# Altium PCB JWpulsegen-V1.PcbDoc
Units mil, origin at the board's own origin, x right, y up, seen from the top; angles counter-clockwise.
Board outline 2603.97 x 1676.2 mil, 2 copper layers (Top Layer, Bottom Layer), stack 64.8 mil thick; 24 components, 12 nets, 64 pads, 84 vias.
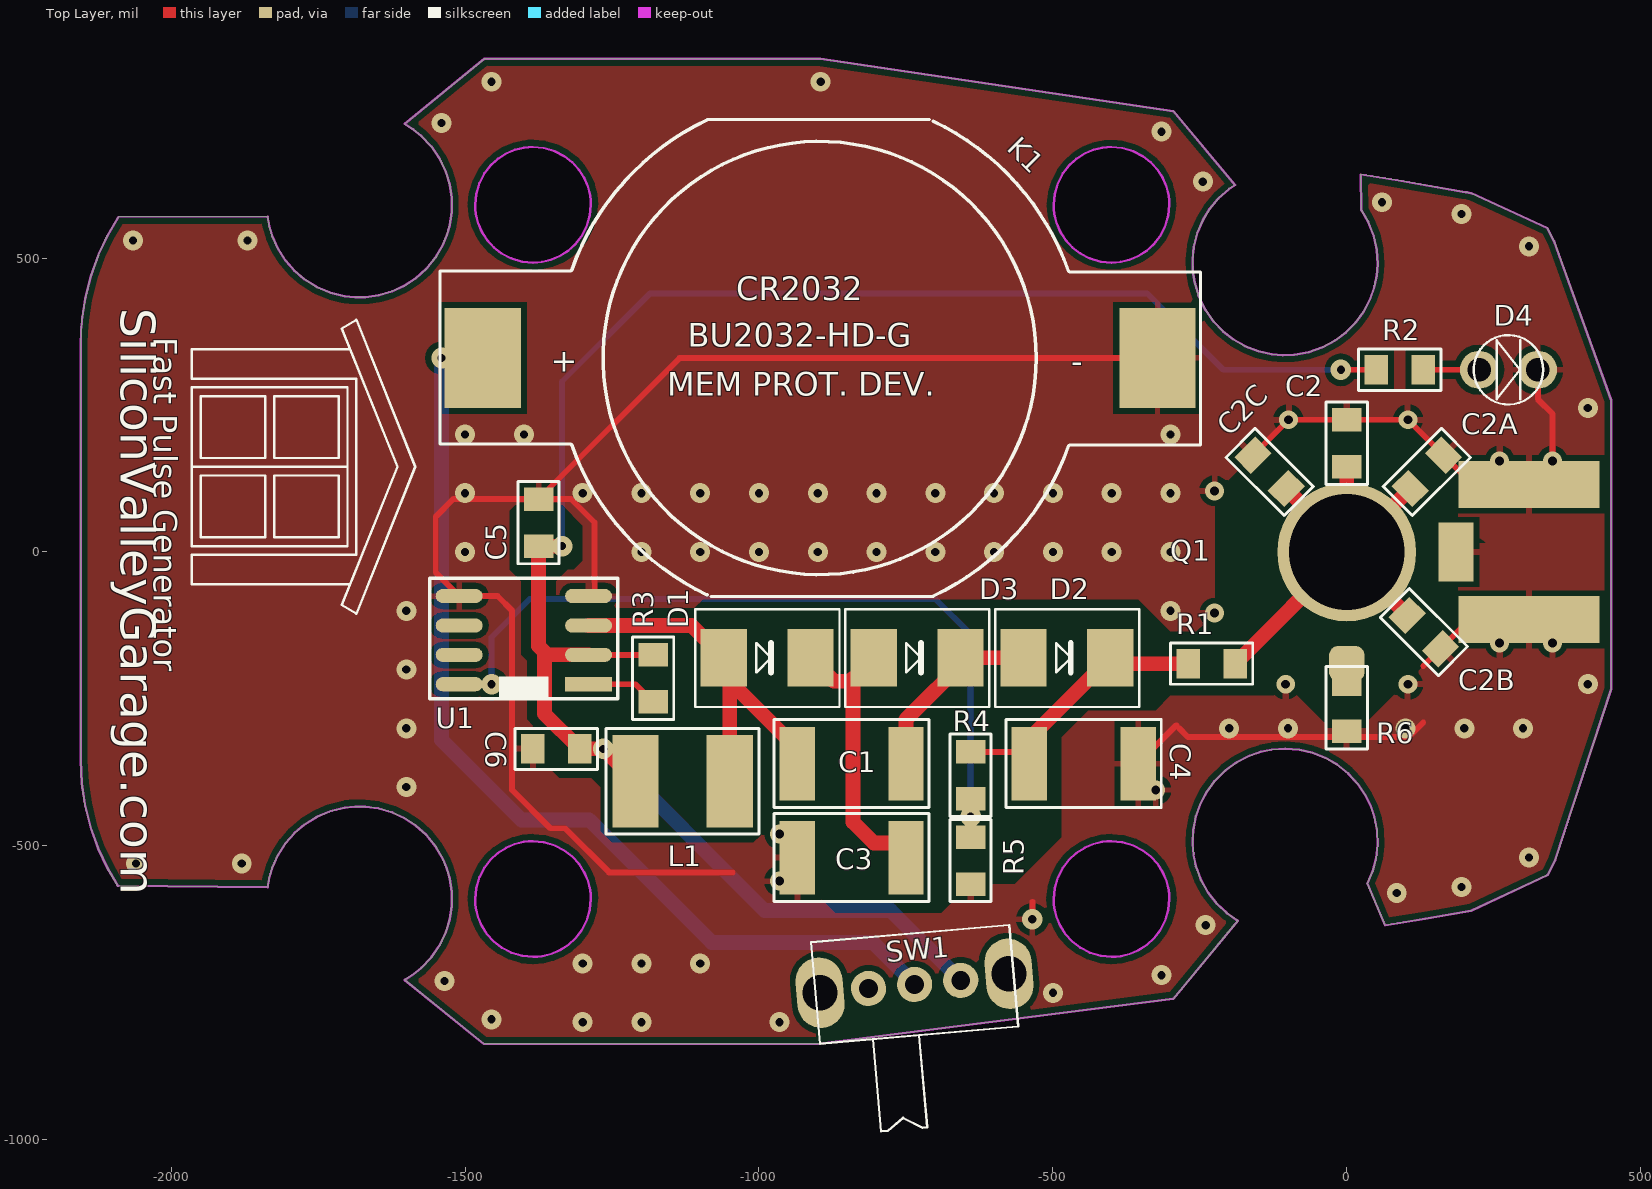
[diagram p0: Top Layer view]
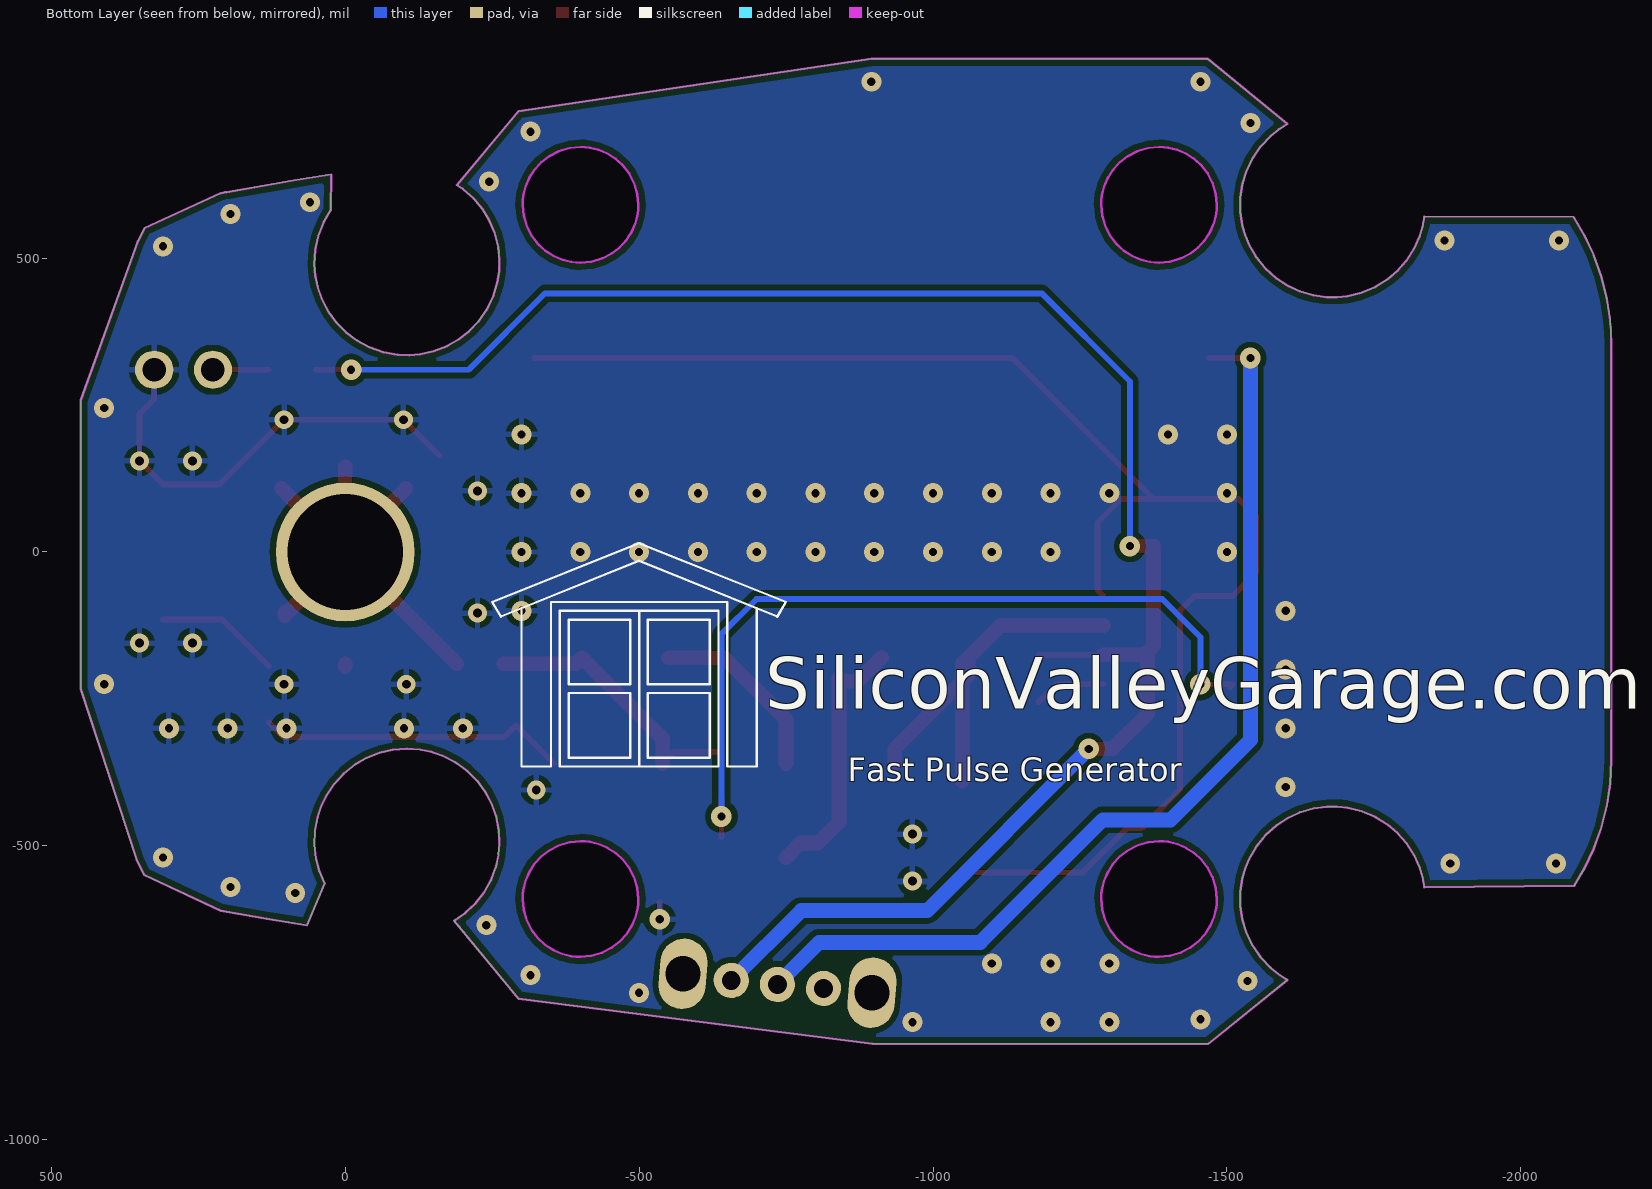
[diagram p1: Bottom Layer view, seen from below]

## Layer stack, top to bottom
Top Solder: solder mask 0.4, Solder Resist, Dk 3.5
Top Layer: signal copper 1.4
Dielectric1: core 62, FR-4, Dk 4.8
Bottom Layer: signal copper 1.4
Bottom Solder: solder mask 0.4, Solder Resist, Dk 3.5

## Board outline
-1603.01,-727.9 -1588.49,-718.71 -1574.66,-707.65 -1557.59,-689.72 -1543.46,-669.19 -1532.68,-646.55 -1526.14,-624.83 -1522.78,-602.26 -1522.81,-578.3 -1526.26,-555.48 -1530.99,-538.96 -1537.71,-522.57 -1550.1,-501.14 -1565.8,-481.79 -1584.49,-465.08 -1603.49,-452.68 -1624.2,-443.09 -1647.19,-436.36 -1670.06,-433.24 -1687.24,-433.12 -1704.86,-434.95 -1728.92,-440.79 -1751.9,-450.41 -1773.21,-463.62 -1790.46,-478.36 -1805.49,-495.52 -1818.44,-515.69 -1827.87,-536.75 -1832.84,-553.2 -1836.05,-570.62 -2090.84,-567.97 -2108.84,-537.22 -2124,-504.91 -2137.3,-467.64 -2146.77,-429.29 -2151.97,-393.84 -2153.97,-354.25 -2153.97,354.51 -2153.44,374.68 -2151.87,394.85 -2146.54,430.33 -2136.93,468.92 -2123.65,505.98 -2108.51,538.09 -2090.43,568.81 -2089.56,570 -1836.05,570.88 -1832.84,553.46 -1827.87,537.01 -1818.44,515.95 -1805.5,495.78 -1790.47,478.62 -1773.21,463.88 -1751.91,450.67 -1728.92,441.05 -1704.86,435.2 -1687.25,433.38 -1670.07,433.5 -1647.2,436.62 -1624.2,443.35 -1603.5,452.93 -1584.49,465.33 -1565.81,482.05 -1550.1,501.39 -1537.71,522.82 -1530.99,539.21 -1526.27,555.73 -1522.81,578.54 -1522.78,602.51 -1526.14,625.07 -1532.68,646.8 -1543.45,669.44 -1557.58,689.97 -1574.65,707.9 -1588.48,718.96 -1603,728.15 -1467,839.2 -895.32,838.96 -295,750 -190,624.25 -200.19,617.72 -218.85,601.08 -233.28,583.63 -245.11,564.18 -254.06,543.12 -260.09,519.67 -262.44,496.63 -261.82,477.72 -258.79,458.3 -251.59,434.68 -240.71,412.33 -226.34,391.86 -210.69,375.5 -192.76,361.48 -172.88,350.15 -150.29,341.42 -127.68,336.41 -108.83,334.82 -89.19,335.57 -64.89,339.97 -41.43,348.18 -19.42,360.07 -1.35,373.71 14.66,389.89 28.23,408.31 39.52,429.74 47.13,451.61 50.9,470.15 52.44,489.74 50.9,514.39 45.48,538.65 36.23,561.89 24.79,581.42 23.86,642.32 92.5,631.18 202.09,612.24 204.78,611.75 207.47,611.27 211.78,610.5 341.17,551.14 352.73,528.59 450,258.11 450,-232.92 354.39,-524.39 342.1,-549.32 211.78,-610.24 209.09,-610.72 206.4,-611.21 202.09,-611.98 133.64,-623.98 65.08,-635.44 35.12,-563.84 43.97,-543.01 49.77,-521 52.34,-498.26 51.44,-474.06 47.12,-451.3 41.14,-433.36 32.7,-415.61 19.06,-395.02 2.25,-376.7 -17.35,-361.17 -37.02,-349.95 -58.2,-341.64 -80.49,-336.44 -104.63,-334.52 -127.73,-336.16 -146.25,-340.01 -164.86,-346.33 -186.9,-357.48 -207.05,-372.04 -224.75,-389.7 -238.18,-407.93 -248.91,-428 -256.66,-449.53 -261.38,-473.29 -262.44,-496.42 -260.77,-515.27 -256.66,-534.49 -248.15,-557.67 -236.03,-579.37 -220.55,-599.01 -204.01,-614.48 -185.32,-627.47 -295,-760 -896.55,-836.55 -1468,-837
cut-out: -400.29,-688.85 -392.64,-688.55 -384.81,-687.62 -369.57,-683.93 -354.56,-677.58 -340.47,-668.58 -327.98,-657.19 -317.65,-643.88 -309.16,-627.61 -303.6,-608.81 -301.87,-590.42 -302.16,-582.77 -303.09,-574.94 -306.78,-559.7 -313.13,-544.69 -322.13,-530.6 -333.52,-518.11 -346.83,-507.78 -363.11,-499.29 -381.9,-493.73 -400.29,-492 -407.94,-492.3 -415.77,-493.22 -431.01,-496.91 -446.02,-503.26 -460.11,-512.26 -472.6,-523.65 -482.93,-536.96 -491.42,-553.24 -496.98,-572.03 -498.72,-590.42 -498.42,-598.07 -497.49,-605.9 -493.8,-621.14 -487.45,-636.15 -478.45,-650.24 -467.06,-662.73 -453.75,-673.06 -437.48,-681.55 -418.68,-687.11
cut-out: -1384.54,-688.85 -1376.89,-688.55 -1369.06,-687.62 -1353.82,-683.93 -1338.82,-677.58 -1324.73,-668.58 -1312.23,-657.19 -1301.9,-643.88 -1293.41,-627.61 -1287.85,-608.81 -1286.12,-590.42 -1286.42,-582.77 -1287.34,-574.94 -1291.04,-559.7 -1297.39,-544.69 -1306.38,-530.6 -1317.77,-518.11 -1331.08,-507.78 -1347.36,-499.29 -1366.15,-493.73 -1384.54,-492 -1392.2,-492.3 -1400.02,-493.22 -1415.26,-496.91 -1430.27,-503.26 -1444.36,-512.26 -1456.86,-523.65 -1467.18,-536.96 -1475.67,-553.24 -1481.24,-572.03 -1482.97,-590.42 -1482.67,-598.07 -1481.74,-605.9 -1478.05,-621.14 -1471.7,-636.15 -1462.71,-650.24 -1451.32,-662.73 -1438,-673.06 -1421.73,-681.55 -1402.94,-687.11
cut-out: -1384.54,492.25 -1376.89,492.55 -1369.06,493.48 -1353.82,497.17 -1338.82,503.52 -1324.73,512.52 -1312.23,523.91 -1301.9,537.22 -1293.41,553.49 -1287.85,572.29 -1286.12,590.68 -1286.42,598.33 -1287.34,606.16 -1291.04,621.4 -1297.39,636.41 -1306.38,650.5 -1317.77,662.99 -1331.08,673.32 -1347.36,681.81 -1366.15,687.37 -1384.54,689.1 -1392.2,688.81 -1400.02,687.88 -1415.26,684.19 -1430.27,677.84 -1444.36,668.84 -1456.86,657.45 -1467.18,644.14 -1475.67,627.87 -1481.24,609.07 -1482.97,590.68 -1482.67,583.03 -1481.74,575.2 -1478.05,559.96 -1471.7,544.95 -1462.71,530.86 -1451.32,518.37 -1438,508.04 -1421.73,499.55 -1402.94,493.99
cut-out: -400.29,492.25 -392.64,492.55 -384.81,493.48 -369.57,497.17 -354.56,503.52 -340.47,512.52 -327.98,523.91 -317.65,537.22 -309.16,553.49 -303.6,572.29 -301.87,590.68 -302.16,598.33 -303.09,606.16 -306.78,621.4 -313.13,636.41 -322.13,650.5 -333.52,662.99 -346.83,673.32 -363.11,681.81 -381.9,687.37 -400.29,689.1 -407.94,688.81 -415.77,687.88 -431.01,684.19 -446.02,677.84 -460.11,668.84 -472.6,657.45 -482.93,644.14 -491.42,627.87 -496.98,609.07 -498.72,590.68 -498.42,583.03 -497.49,575.2 -493.8,559.96 -487.45,544.95 -478.45,530.86 -467.06,518.37 -453.75,508.04 -437.48,499.55 -418.68,493.99

## Design rules (kind name [scope] priority, off if disabled: settings)
AssemblyTestPointUsage [All] p1 off:
AssemblyTestpoint [All] p1 off: testpointundercomponent=TRUE minsize=40 maxsize=100 preferedsize=60 minholesize=0 maxholesize=40 preferedholesize=32 testpointgrid=1 usegrid=TRUE gridtolerance=0.01 allowsidetop=TRUE allowsidebottom=TRUE
Clearance Clearance_1 [InPolygon] p1: gap=10 ignorepadtopadclearanceinfootprint=FALSE
Clearance [All] p2: gap=10 ignorepadtopadclearanceinfootprint=FALSE
ComponentClearance [All] p1 off: gap=10 collisioncheckmode=3 verticalgap=10 showdistances=FALSE
DiffPairsRouting [All] p1 off: maxlimit=10 minlimit=10 mostfreqgap=10 toplayer_minwidth=15 toplayer_maxwidth=15 toplayer_prefwidth=15 bottomlayer_minwidth=15 bottomlayer_maxwidth=15 bottomlayer_prefwidth=15 maxuncoupledlength=500
FabricationTestPointUsage [All] p1 off: valid=0 allowmultiple=FALSE
FabricationTestpoint [All] p1 off: side=3 testpointundercomponent=TRUE minsize=40 maxsize=100 preferedsize=60 minholesize=0 maxholesize=40 preferedholesize=32 testpointgrid=1 allowsidetop=TRUE allowsidebottom=TRUE usegrid=TRUE gridtolerance=0.01
FanoutControl Fanout_BGA [IsBGA] p1 off: bgadir=Out bgaviamode=Centered fanoutstyle=Auto fanoutdirection=Alternating viagrid=1 // Fanout_BGA (Default Rule)
FanoutControl Fanout_LCC [IsLCC] p2 off: bgadir=Out bgaviamode=Centered fanoutstyle=Auto fanoutdirection=Alternating viagrid=1 // Fanout_LCC (Default Rule)
FanoutControl Fanout_SOIC [IsSOIC] p3 off: bgadir=Out bgaviamode=Centered fanoutstyle=Auto fanoutdirection=Alternating viagrid=1 // Fanout_SOIC (Default Rule)
FanoutControl Fanout_Small [(CompPinCount < 5)] p4 off: bgadir=Out bgaviamode=Centered fanoutstyle=Auto fanoutdirection=OutThenIn viagrid=1 // Fanout_Small (Default Rule)
FanoutControl Fanout_Default [All] p5 off: bgadir=Out bgaviamode=Centered fanoutstyle=Auto fanoutdirection=Alternating viagrid=1 // Fanout_Default (Default Rule)
Height [All] p1 off: minheight=0 maxheight=1000 prefheight=500
HoleSize [All] p1 off: absolutevalues=TRUE maxlimit=100 minlimit=1 maxpercent=80.000 minpercent=20.000
HoleToHoleClearance [All] p1 off: gap=10 allowstackedmicrovias=TRUE
LayerPairs [All] p1 off: enforce=TRUE
MinimumSolderMaskSliver [All] p1 off: minsoldermaskwidth=10
NetAntennae [All] p1 off: netantennaetolerance=0
PasteMaskExpansion [All] p1 off: expansion=0
PlaneClearance [All] p1 off: clearance=20
PlaneConnect [All] p1 off: planeconnectstyle=Relief reliefexpansion=20 reliefentries=4 reliefconductorwidth=10 reliefairgap=10
PolygonConnect [All] p1: connectstyle=Relief reliefconductorwidth=10 reliefentries=4 polygonreliefangle="90 Angle" airgapwidth=10
RoutingCorners [All] p1 off: cornerstyle=45-Degree minsetback=100 maxsetback=100
RoutingLayers [All] p1 off: top layer_v5=TRUE bottom layer_v5=TRUE
RoutingPriority [All] p1 off: routingpriority=0
RoutingTopology [All] p1 off: topology=Shortest
RoutingVias [All] p1: holewidth=14 width=35 viastyle="Through Hole" minholewidth=14 minwidth=35 maxholewidth=28 maxwidth=50
SilkToSilkClearance [All] p1 off: silktosilkclearance=10
SilkToSolderMaskClearance SilkscreenOverComponentPads [IsPad] p1 off: minsilkscreentomaskgap=10 clearancetoexposedcopper=TRUE
SolderMaskExpansion [All] p1 off: expansion=4 istentingtop=FALSE
Width [All] p1: maxlimit=100 minlimit=10 preferedwidth=10 minimp=50.000000 maximp=50.000000 favimp=50.000000
4 further rules are at their usual default settings.

## Components (designator, comment, footprint, x,y, rotation, side; value= is the part's Value field where it differs from the comment)
C1 "470nF" 1812C-GENERIC -935,-360 r0 top
C2 "2pF" 0805C-GENERIC 0,155 r90 top
C2A "2pF" 0805C-GENERIC 115,115 r45 top
C2B "2pF" 0805C-GENERIC 110,-115 r315 top
C2C "2pF" 0805C-GENERIC -110,115 r135 top
C3 "470nF" 1812C-GENERIC -935,-520 r0 top
C4 "470nF" 1812C-GENERIC -355,-360 r180 top
C5 "10uF" 0805C-GENERIC -1375,20 r90 top
C6 "10uF" 0805C-GENERIC -1315,-335 r180 top
D1 "MURS120" DIODE-SMB -1060,-180 r180 top
D2 "MURS120" DIODE-SMB -550,-180 r180 top
D3 "MURS120" DIODE-SMB -805,-180 r180 top
D4 "LED-YELLOW-3MM" LED-3MM-YELLOW 225,310 r0 top
K1 "3V-CR2023" BATCLIP-CR2032 -1470,330 r0 top
L1 "150uH" TOKO-NR4018 -1210,-390 r0 top
Q1 "2N2369-JW" JW2N2369 70,-35 r0 top
R1 "10M" 0805R-TBD -260,-190 r0 top
R2 "220R" 0805R-220 60,310 r0 top
R3 "220R" 0805R-220 -1180,-185 r270 top
R4 "10M" 0805R-TBD -640,-350 r270 top
R5 "10K" 0805R-10K -640,-485 r270 top
R6 "10K" 0805R-10K 0,-225 r270 top
SW1 "SW-SPDT-CK-OS102011" CK-OS102011 -822,-1099 r5 top
U1 "LT1073" SO8 -1290,-225 r180 top

## Footprints (in the part's own frame and the unit in brackets; to place one, negate y for a bottom-side part, rotate by r counter-clockwise, add the part's x,y. Pads: shape width x height; smd on the part's side, far side on the other; paste and mask are expansions set on the pad)
0805C-GENERIC [mil] "CAPACITOR 0805"
  rect 40x50 smd: 1(-10,0) 2(70,0)
  silkscreen extent -40,-35 100,35, body extent -11,-25 70,25, height 26
0805R-10K [mil] "RESISTOR 0805"
  rect 40x50 smd: 1(0,0) 2(80,0)
  silkscreen extent -30,-35 110,35, body extent -1,-25 80,25, height 27
0805R-220 [mil] "RESISTOR 0805"
  rect 40x50 smd: 1(-10,0) 2(70,0)
  silkscreen extent -40,-35 100,35, body extent -11,-25 70,25, height 27
0805R-TBD [mil] "RESISTOR 0805 VALUE TO BE DETERMINED"
  rect 40x50 smd: 1(-10,0) 2(70,0)
  silkscreen extent -40,-35 100,35, body extent -11,-25 70,25, height 27
1812C-GENERIC [mil]
  rect 60x125 smd: 1(0,0) 2(185,0)
  silkscreen extent -39,-75 224,75, body extent 2,-63 179,63, height 63
BATCLIP-CR2032 [mil] "BATTERY CLIP 2032 SMD BU2032SM-HD-G"
  rect 130x170 smd mask+2: +(0,0) -(1148,0)
  silkscreen extent -73,-406 1221,406, body extent -56,-393 1204,397, height 209
CK-OS102011 [mil] "C&K CK-OS102011MA1QN1"
  round 60 hole 32 mask+2: C(118.11,354.33) NC(39.37,354.33) NO(196.85,354.33)
  oval 80x120 hole 60 mask+2: M1(279.53,358.27) M2(-43.31,354.33)
  silkscreen extent -51,110 287,441, body extent -51,111 288,441, height 200
DIODE-SMB [mm]
  rect 2x2.5 smd: A(0,0) K(-3.75,0)
  silkscreen extent -5,-2.1 1.22,2.12, body extent -4.57,-1.95 0.8,2, height 2.23
JW2N2369 [mil]
  rrect50% 60x60 smd mask+2: B(-70,-155)
  round 236.22 hole 196.85 mask+2: C(-70,35)
  rect 60x100 smd mask+2: G(116,35)
  body extent -218,-165 215,209, height 140
LED-3MM-YELLOW [mil]
  round 65 hole 40: A(0,0) K(100,0)
  silkscreen extent -9,-59 109,59, body extent -15,-63 114,67, height 250
SO8 [mil]
  rect 80x24 smd: 1(0,0)
  oval 80x24 smd: 2(0,-50) 3(0,-100) 4(0,-150) 5(220,-150) 6(220,-100) 7(220,-50) 8(220,0)
  silkscreen extent -50,-180 270,25, body extent -18,-170 242,22, height 61
TOKO-NR4018 [mm] "TOKO INDUCTOR NR4018 SERIES"
  rect 2x4 smd mask+0.051: 1(0,0) 2(4.064,0)
  silkscreen extent -1.27,-2.29 5.33,2.29, body extent 0,-2.03 4.06,2.03, height 1.8

## Part data
C1 C3 C4: library part 1812C-470nF-250V-X7R-MUR, "CAPACITOR 1812 CERAMIC"
C2 C2A C2B C2C C5 C6: library part 0805C-10UF-6V3-X5R-PAN, "CAPACITOR 0805 CERAMIC"
D1 D2 D3: "DIODE"
K1: library part BATCLIP-CR2032-SMD, "BU2032SM-HD-G"
L1: library part 150U-NR4018-TOKO
R1 R4: library part 0805R-10M, "RESISTOR 0805 VALUE TO BE DETERMINED"
R2 R3: library part 0805R-220R, "RESISTOR 0805 1/4 WATT THIN FILM"
R5 R6: library part 0805R-10K, "RESISTOR 0805 1/4 WATT THIN FILM"
SW1: "SWITCH DPDT"

## Free pads (board coordinates)
  round 150 on Mech1 mask+2: 0(-1385,-591) 1(-400,-590) 2(-400,591) 3(-1385,591)
  rect 240x80 smd mask+2: 2(310,-115) 2(310,115)

## Via types
v1: diameter 34, hole 14, Top Layer to Bottom Layer, 64 vias
v2: diameter 32, hole 15, Top Layer to Bottom Layer, 13 vias
v3: diameter 35, hole 14, Top Layer to Bottom Layer, 7 vias

## Nets (pads, with @x,y where several pads share a name; then routed paths per layer and width w, separated by ;. In a path a pad name is that pad's centre, name@x,y a point inside that pad or via, vN(x,y) a via of type N, cw(c..) or ccw(c..) an arc to the next point about the centre after c; other vN are vias at no path point)
GND: C2.2 C2A.2 C2B.2 C2C.2 C3.1 C4.1 C5.2 C6.2 D4.K K1.- pad.2@310,115 pad.2@310,-115 Q1.G R5.2 R6.2 U1.4 U1.5 | length 4098.7
  Top Layer w10: U1.4 -1280,-65 -1280,50 -1320,90 C5.2 ; -1045,-545 -1255,-545 -1330,-470 -1355,-470 -1420,-405 -1420,-380 -1420,-100 -1445,-75 U1.5 -1550,-35 -1550,60 -1520,90 C5.2 ; v3(-535,-625) -535,-595 ; C4.1 -290,-295 ; K1.- -1135,330 C5.2 ; -285,-300 -270,-315 105,-315 130,-290 ; C2C.2 v2(-98.99,225) C2.2 v2(103.99,225) C2A.2 213.99,115 310,115 v2(349.99,154.99) 350,235 325,260 D4.K ; 130,-193.99 C2B.2 208.99,-115 pad.2@310,-115
  other v1: -1300,-800 -1200,-800 -965,-800 -1455,-795 -500,-750 -1535,-730 -315,-720 -1300,-700 -1200,-700 -1100,-700 -240,-635 85,-580 195,-570 -2060,-530 -1880,-530 310,-520 -1600,-400 -1600,-300 -200,-300 -100,-300 100,-300 200,-300 300,-300 410,-225 -1600,-200 -1600,-100 -300,-100 -1500,0 -1200,0 -1100,0 -1000,0 -900,0 -800,0 -700,0 -600,0 -500,0 -400,0 -300,0 -1500,100 -1300,100 -1200,100 -1100,100 -1000,100 -900,100 -800,100 -700,100 -600,100 -500,100 -400,100 -300,100 -1500,200 -1400,200 -300,200 410,245 310,520 -2065,530 -1870,530 195,575 60,595 -245,630 -315,715 -1540,730 -1455,800 -895,800
  other v2: -965,-560 -965,-480 -325,-405 -103.99,-225 103.99,-225 260,-155 350,-155 -225,-103.99 -225,103.99 260,155
NetC1_1: C1.1 D1.A L1.2 U1.3 | length 698.7
  Top Layer w25: U1.3 -1115,-125 D1.A ; L1.2 D1.A@-1050,-220 ; C1.1 -935,-335 D1.A@-1050,-220 ; D1.A -1050,-190 D1.A@-1050,-220 ; D1.A -1060,-210 D1.A@-1050,-220
NetC1_2: C1.2 D2.A D3.K | length 318.5
  Top Layer w25: C1.2 -750,-285 -645,-180 D2.A
NetC2_1: C2.1 C2A.1 C2B.1 C2C.1 Q1.C R1.2 | length 862.5
  Top Layer w25: R1.2 Q1.C ; C2C.1 Q1.C@0,5 ; Q1.C@0,-5 C2B.1 C2B.1@102.93,-102.93 ; C2.1 Q1.C@0,5 ; C2A.1 Q1.C ; Q1.C Q1.C@0,5
NetC3_2: C3.2 D1.K D3.A | length 550.9
  Top Layer w25: D1.K -872.36,-220 -845,-220 -840,-215 -840,-460 ; -840,-360 -840,-460 ; C3.2 -775,-495 -805,-495 -840,-460
NetC4_2: C4.2 D2.K R1.1 R4.1 | length 481.8
  Top Layer w10: R4.1 -560,-340 C4.2
  Top Layer w25: C4.2 -540,-317.64 D2.K -392.36,-190 R1.1
NetC5_1: C5.1 C6.1 L1.1 R2.1 R3.1 SW1.NO U1.2 | length 3269.1
  Top Layer w10: U1.2 R3.1 ; v3(-10,310) R2.1
  Top Layer w25: v3(-1335,10) C5.1 -1375,-160 -1365,-170 -1365,-175 ; U1.2 -1365,-175 ; L1.1 v3(-1265,-335) C6.1 -1365,-275 -1365,-175
  Bottom Layer w10: v3(-1335,10) -1335,290 -1185,440 -340,440 -210,310 v3(-10,310)
  Bottom Layer w25: v3(-1265,-335) -990,-610 -775.64,-610 SW1.NO
NetD4_A: D4.A R2.2 | length 95
  Top Layer w10: R2.2 D4.A
NetK1_+: K1.+ SW1.C | length 1697
  Top Layer w10: v3(-1540,330) K1.+
  Bottom Layer w25: v3(-1540,330) -1540,-320 -1404.1,-455.9 -1289.1,-455.9 -1080.76,-664.24 -806.71,-664.24 SW1.C
NetQ1_B: Q1.B R6.1 | length 5
  Top Layer w25: Q1.B@0,-195 Q1.B
NetR3_2: R3.2 U1.1 | length 122.4
  Top Layer w10: U1.1 -1210,-225 R3.2
NetR4_2: R4.2 R5.1 U1.8 | length 1383.8
  Top Layer w10: U1.8@-1505,-230 U1.8 v3(-1455,-225) ; R5.1 v3(-640,-450) R4.2
  Bottom Layer w10: v3(-1455,-225) -1455,-145 -1390,-80 -1160,-80 -700,-80 -640,-140 v3(-640,-450)
pads on no net: SW1.M1 SW1.M2 SW1.NC U1.6 U1.7

## Polygon pours and split planes (outlines as drawn)
GND on Top Layer "TOP GND GND" (solid, remove dead copper, pour order 3): -225,-103.99 -256.01,-135 -300,-135 -355,-80 -460,-80 -460,805 180,805 485,500 485,0 195,0 190,-5 190,138.99 103.99,225 -98.99,225 -225,98.99
GND on Top Layer "TOP GND GND" (solid, remove dead copper, pour order 5): 505,15 190,15 190,-133.99 23.99,-300 -28.99,-300 -103.99,-225 -105,-225 -125,-245 -300,-245 -325,-270 -440,-270 -485,-315 -485,-485 -565,-565 -640,-565 -690,-615 -870,-615 -905,-580 -905,-455 -970,-455 -1010,-495 -1250,-495 -1270,-475 -1270,-400 -1285,-385 -1340,-385 -1365,-360 -1370,-310 -1395,-285 -1395,-185 -1405,-175 -1405,-50 -1425,-30 -1425,70 -1415,80 -1335,80 -1300,45 -1300,-15 -1315,-30 -1325,-30 -1345,-50 -1345,-95 -1110,-95 -1095,-80 -455,-80 -455,855 -2215,855 -2215,-850 505,-850
GND on Bottom Layer "TOP GND GND" (solid, remove dead copper, pour order 7): 495,855 -2230,855 -2230,-865 -2220,-875 325,-875 505,-695

## Keep-outs
Keep-Out Layer:
  lines w4: -2153.97,-354.25 -2153.97,354.51 -2153.44,374.68 -2151.87,394.85 -2146.54,430.33 -2136.93,468.92 -2123.65,505.98 -2108.51,538.09 -2090.43,568.81 -2089.56,570 -1836.05,570.88 -1832.84,553.46 -1827.87,537.01 -1818.44,515.95 -1805.5,495.78 -1790.47,478.62 -1773.21,463.88 -1751.91,450.67 -1728.92,441.05 -1704.86,435.2 -1687.25,433.38 -1670.07,433.5 -1647.2,436.62 -1624.2,443.35 -1603.5,452.93 -1584.49,465.33 -1565.81,482.05 -1550.1,501.39 -1537.71,522.82 -1530.99,539.21 -1526.27,555.73 -1522.81,578.54 -1522.78,602.51 -1526.14,625.07 -1532.68,646.8 -1543.45,669.44 -1557.58,689.97 -1574.65,707.9 -1588.48,718.96 -1603,728.15 -1467,839.2 -895.32,838.96 -295,750 -190,624.25 -200.19,617.72 -218.85,601.08 -233.28,583.63 -245.11,564.18 -254.06,543.12 -260.09,519.67 -262.44,496.63 -261.82,477.72 -258.79,458.3 -251.59,434.68 -240.71,412.33 -226.34,391.86 -210.69,375.5 -192.76,361.48 -172.88,350.15 -150.29,341.42 -127.68,336.41 -108.83,334.82 -89.19,335.57 -64.89,339.97 -41.43,348.18 -19.42,360.07 -1.35,373.71 14.66,389.89 28.23,408.31 39.52,429.74 47.13,451.61 50.9,470.15 52.44,489.74 50.9,514.39 45.48,538.65 36.23,561.89 24.79,581.42 23.86,642.32 92.5,631.18 202.09,612.24 204.78,611.75 207.47,611.27 211.78,610.5 341.17,551.14 352.73,528.59 450,258.11 450,-232.92 354.39,-524.39 342.1,-549.32 211.78,-610.24 209.09,-610.72 206.4,-611.21 202.09,-611.98 133.64,-623.98 65.08,-635.44 35.12,-563.84 43.97,-543.01 49.77,-521 52.34,-498.26 51.44,-474.06 47.12,-451.3 41.14,-433.36 32.7,-415.61 19.06,-395.02 2.25,-376.7 -17.35,-361.17 -37.02,-349.95 -58.2,-341.64 -80.49,-336.44 -104.63,-334.52 -127.73,-336.16 -146.25,-340.01 -164.86,-346.33 -186.9,-357.48 -207.05,-372.04 -224.75,-389.7 -238.18,-407.93 -248.91,-428 -256.66,-449.53 -261.38,-473.29 -262.44,-496.42 -260.77,-515.27 -256.66,-534.49 -248.15,-557.67 -236.03,-579.37 -220.55,-599.01 -204.01,-614.48 -185.32,-627.47 -295,-760 -896.55,-836.55 -1468,-837 -1603.01,-727.9 -1588.49,-718.71 -1574.66,-707.65 -1557.59,-689.72 -1543.46,-669.19 -1532.68,-646.55 -1526.14,-624.83 -1522.78,-602.26 -1522.81,-578.3 -1526.26,-555.48 -1530.99,-538.96 -1537.71,-522.57 -1550.1,-501.14 -1565.8,-481.79 -1584.49,-465.08 -1603.49,-452.68 -1624.2,-443.09 -1647.19,-436.36 -1670.06,-433.24 -1687.24,-433.12 -1704.86,-434.95 -1728.92,-440.79 -1751.9,-450.41 -1773.21,-463.62 -1790.46,-478.36 -1805.49,-495.52 -1818.44,-515.69 -1827.87,-536.75 -1832.84,-553.2 -1836.05,-570.62 -2090.84,-567.97 -2108.84,-537.22 -2124,-504.91 -2137.3,-467.64 -2146.77,-429.29 -2151.97,-393.84 -2153.97,-354.25 ; -1482.97,-590.42 -1482.67,-598.07 -1481.74,-605.9 -1478.05,-621.14 -1471.7,-636.15 -1462.71,-650.24 -1451.32,-662.73 -1438,-673.06 -1421.73,-681.55 -1402.94,-687.11 -1384.54,-688.85 -1376.89,-688.55 -1369.06,-687.62 -1353.82,-683.93 -1338.82,-677.58 -1324.73,-668.58 -1312.23,-657.19 -1301.9,-643.88 -1293.41,-627.61 -1287.85,-608.81 -1286.12,-590.42 -1286.42,-582.77 -1287.34,-574.94 -1291.04,-559.7 -1297.39,-544.69 -1306.38,-530.6 -1317.77,-518.11 -1331.08,-507.78 -1347.36,-499.29 -1366.15,-493.73 -1384.54,-492 -1392.2,-492.3 -1400.02,-493.22 -1415.26,-496.91 -1430.27,-503.26 -1444.36,-512.26 -1456.86,-523.65 -1467.18,-536.96 -1475.67,-553.24 -1481.24,-572.03 -1482.97,-590.42 ; -1482.97,590.68 -1482.67,583.03 -1481.74,575.2 -1478.05,559.96 -1471.7,544.95 -1462.71,530.86 -1451.32,518.37 -1438,508.04 -1421.73,499.55 -1402.94,493.99 -1384.54,492.25 -1376.89,492.55 -1369.06,493.48 -1353.82,497.17 -1338.82,503.52 -1324.73,512.52 -1312.23,523.91 -1301.9,537.22 -1293.41,553.49 -1287.85,572.29 -1286.12,590.68 -1286.42,598.33 -1287.34,606.16 -1291.04,621.4 -1297.39,636.41 -1306.38,650.5 -1317.77,662.99 -1331.08,673.32 -1347.36,681.81 -1366.15,687.37 -1384.54,689.1 -1392.2,688.81 -1400.02,687.88 -1415.26,684.19 -1430.27,677.84 -1444.36,668.84 -1456.86,657.45 -1467.18,644.14 -1475.67,627.87 -1481.24,609.07 -1482.97,590.68 ; -498.72,-590.42 -498.42,-598.07 -497.49,-605.9 -493.8,-621.14 -487.45,-636.15 -478.45,-650.24 -467.06,-662.73 -453.75,-673.06 -437.48,-681.55 -418.68,-687.11 -400.29,-688.85 -392.64,-688.55 -384.81,-687.62 -369.57,-683.93 -354.56,-677.58 -340.47,-668.58 -327.98,-657.19 -317.65,-643.88 -309.16,-627.61 -303.6,-608.81 -301.87,-590.42 -302.16,-582.77 -303.09,-574.94 -306.78,-559.7 -313.13,-544.69 -322.13,-530.6 -333.52,-518.11 -346.83,-507.78 -363.11,-499.29 -381.9,-493.73 -400.29,-492 -407.94,-492.3 -415.77,-493.22 -431.01,-496.91 -446.02,-503.26 -460.11,-512.26 -472.6,-523.65 -482.93,-536.96 -491.42,-553.24 -496.98,-572.03 -498.72,-590.42 ; -498.72,590.68 -498.42,583.03 -497.49,575.2 -493.8,559.96 -487.45,544.95 -478.45,530.86 -467.06,518.37 -453.75,508.04 -437.48,499.55 -418.68,493.99 -400.29,492.25 -392.64,492.55 -384.81,493.48 -369.57,497.17 -354.56,503.52 -340.47,512.52 -327.98,523.91 -317.65,537.22 -309.16,553.49 -303.6,572.29 -301.87,590.68 -302.16,598.33 -303.09,606.16 -306.78,621.4 -313.13,636.41 -322.13,650.5 -333.52,662.99 -346.83,673.32 -363.11,681.81 -381.9,687.37 -400.29,689.1 -407.94,688.81 -415.77,687.88 -431.01,684.19 -446.02,677.84 -460.11,668.84 -472.6,657.45 -482.93,644.14 -491.42,627.87 -496.98,609.07 -498.72,590.68

## Silkscreen, mask and mechanical layers (free items; w line width, h text height)
Top Overlay:
  lines w4: -1695.85,-55 -1735,-55 -1965,-55 -1965,-5 -1685,-5 -1685,145 -1685,295 -1965,295 -1965,345 -1735,345 -1695.85,345 ; -1965,145 -1965,280 -1700,280 -1700,145 ; -1965,145 -1700,145 ; -1965,145 -1700,145 ; -1965,145 -1965,10 -1700,10 -1700,145 ; -1950,25 -1840,25 -1840,130 -1950,130 -1950,25 ; -1950,160 -1840,160 -1840,265 -1950,265 -1950,160 ; -1825,25 -1825,130 -1715,130 -1715,25 -1825,25 ; -1825,160 -1825,265 -1715,265 -1715,160 -1825,160 ; -1710,-90 -1685,-105 -1585,145 -1685,395 -1710,380 -1615,145 -1710,-90
  text "SiliconValleyGarage.com" at -2105,415 h100 r270
  text "Fast Pulse Generator" at -2030,365 h40 r270
  text ".Layer_Name" at 3328.22,-4111.72 h80
Bottom Overlay:
  lines w4: -700,-95.85 -700,-135 -700,-365 -650,-365 -650,-85 -500,-85 -350,-85 -350,-365 -300,-365 -300,-135 -300,-95.85 ; -500,-365 -635,-365 -635,-100 -500,-100 ; -500,-365 -500,-100 ; -500,-365 -500,-100 ; -500,-365 -365,-365 -365,-100 -500,-100 ; -750,-85 -500,15 -250,-85 -265,-110 -500,-15 -735,-110 -750,-85 ; -620,-350 -515,-350 -515,-240 -620,-240 -620,-350 ; -620,-225 -620,-115 -515,-115 -515,-225 -620,-225 ; -485,-350 -380,-350 -380,-240 -485,-240 -485,-350 ; -485,-225 -485,-115 -380,-115 -380,-225 -485,-225
  text "SiliconValleyGarage.com" at -715,-295.5 h150
  text "Fast Pulse Generator" at -855,-390 h40
  text ".Layer_Name" at -5633.22,-4106.72 h80
Top Solder:
  region: 215,-115 30,-300 -30,-300 -85,-245 -255,-245 -275,-225 -275,-155 -225,-105 -225,105 -105,225 105,225 215,115
  text ".Layer_Name" at -5408.22,-3616.72 h80
Bottom Solder:
  circle w100: c0,0 r166.88
  text ".Layer_Name" at -5408.22,-3916.72 h80
Mechanical 1:
  text ".Layer_Name" at -5408.22,-4116.72 h80
Mechanical 2:
  lines w4: 1755,-3385.85 1755,-3425 1755,-3655 1805,-3655 1805,-3375 1955,-3375 2105,-3375 2105,-3655 2155,-3655 2155,-3425 2155,-3385.85 ; 1955,-3655 1820,-3655 1820,-3390 1955,-3390 ; 1955,-3655 1955,-3390 ; 1955,-3655 1955,-3390 ; 1955,-3655 2090,-3655 2090,-3390 1955,-3390 ; 1705,-3375 1955,-3275 2205,-3375 2190,-3400 1955,-3305 1720,-3400 1705,-3375 ; 1835,-3640 1940,-3640 1940,-3530 1835,-3530 1835,-3640 ; 1835,-3515 1835,-3405 1940,-3405 1940,-3515 1835,-3515 ; 1970,-3640 2075,-3640 2075,-3530 1970,-3530 1970,-3640 ; 1970,-3515 1970,-3405 2075,-3405 2075,-3515 1970,-3515
  lines w8: -5608.22,-3216.72 4191.78,-3216.72 ; -4608.22,-4316.72 -4608.22,-3216.72 ; -1708.22,-4316.72 -1708.22,-3216.72 ; 1491.78,-4316.72 1491.78,-3816.72 ; 1491.78,-3216.72 1491.78,-3816.72 ; 4191.78,-3816.72 1491.78,-3816.72 ; -5708.22,-4416.72 -5708.22,3583.28 4291.78,3583.28 4291.78,-4416.72 -5708.22,-4416.72 ; -5608.22,-4316.72 -5608.22,3483.28 4191.78,3483.28 4191.78,-4316.72 -5608.22,-4316.72
  text "Layer Stack" at -5408.22,-3316.72 h100
  text ".Layer_Name" at -5408.22,-3416.72 h80
  text "Board Material : FR4  62 Mils (1.6mm) end thickness" at -4508.22,-3416.72 h80
  text "Number of components" at -1608.22,-3416.72 h80
  text ".Component_Count" at -608.22,-3416.72 h80
  text "SiliconValleyGarage.com" at 2320,-3420 h200
  text "Double sided" at -4508.22,-3516.72 h80
  text "Number of holes" at -1608.22,-3516.72 h80
  text ".Hole_Count" at -608.22,-3516.72 h80
  text "HASL finish - Lead free not required" at -4508.22,-3616.72 h80
  text "Number of pads" at -1608.22,-3616.72 h80
  text ".Pad_Count" at -608.22,-3616.72 h80
  text "Top and bottom Liquid soldermask Blue OR CHEAPEST" at -4508.22,-3716.72 h80
  text "Number of vias" at -1608.22,-3716.72 h80
  text ".Via_Count" at -608.22,-3716.72 h80
  text "Top and bottom Liquid silkscreen White" at -4508.22,-3816.72 h80
  text "Printed" at -1608.22,-3916.72 h80
  text ".Print_Date" at -608.22,-3916.72 h80
  text "USB Isolator" at 1585,-3985 h150
  text "Use Keepout layer for board contour milling" at -4508.22,-4016.72 h80
  text ".Print_Time" at -608.22,-4016.72 h80
  text "Scale" at -1608.22,-4116.72 h80
  text ".Print_Scale" at -608.22,-4116.72 h80
  text "Drawn By : Vincent Himpe" at 1594.45,-4251.55 h80

## Text inside footprints (layer, text, board x,y; h text height)
K1: Top Overlay "-" at -469,305 h40; Top Overlay "+" at -1354,307 h40; Top Overlay "CR2032" at -1039,428 h40; Top Overlay "BU2032-HD-G" at -1121,349 h40; Top Overlay "MEM PROT. DEV." at -1156,266 h40